# EAGLE board Main Board PCB v7 (EAGLE 9.7.0)
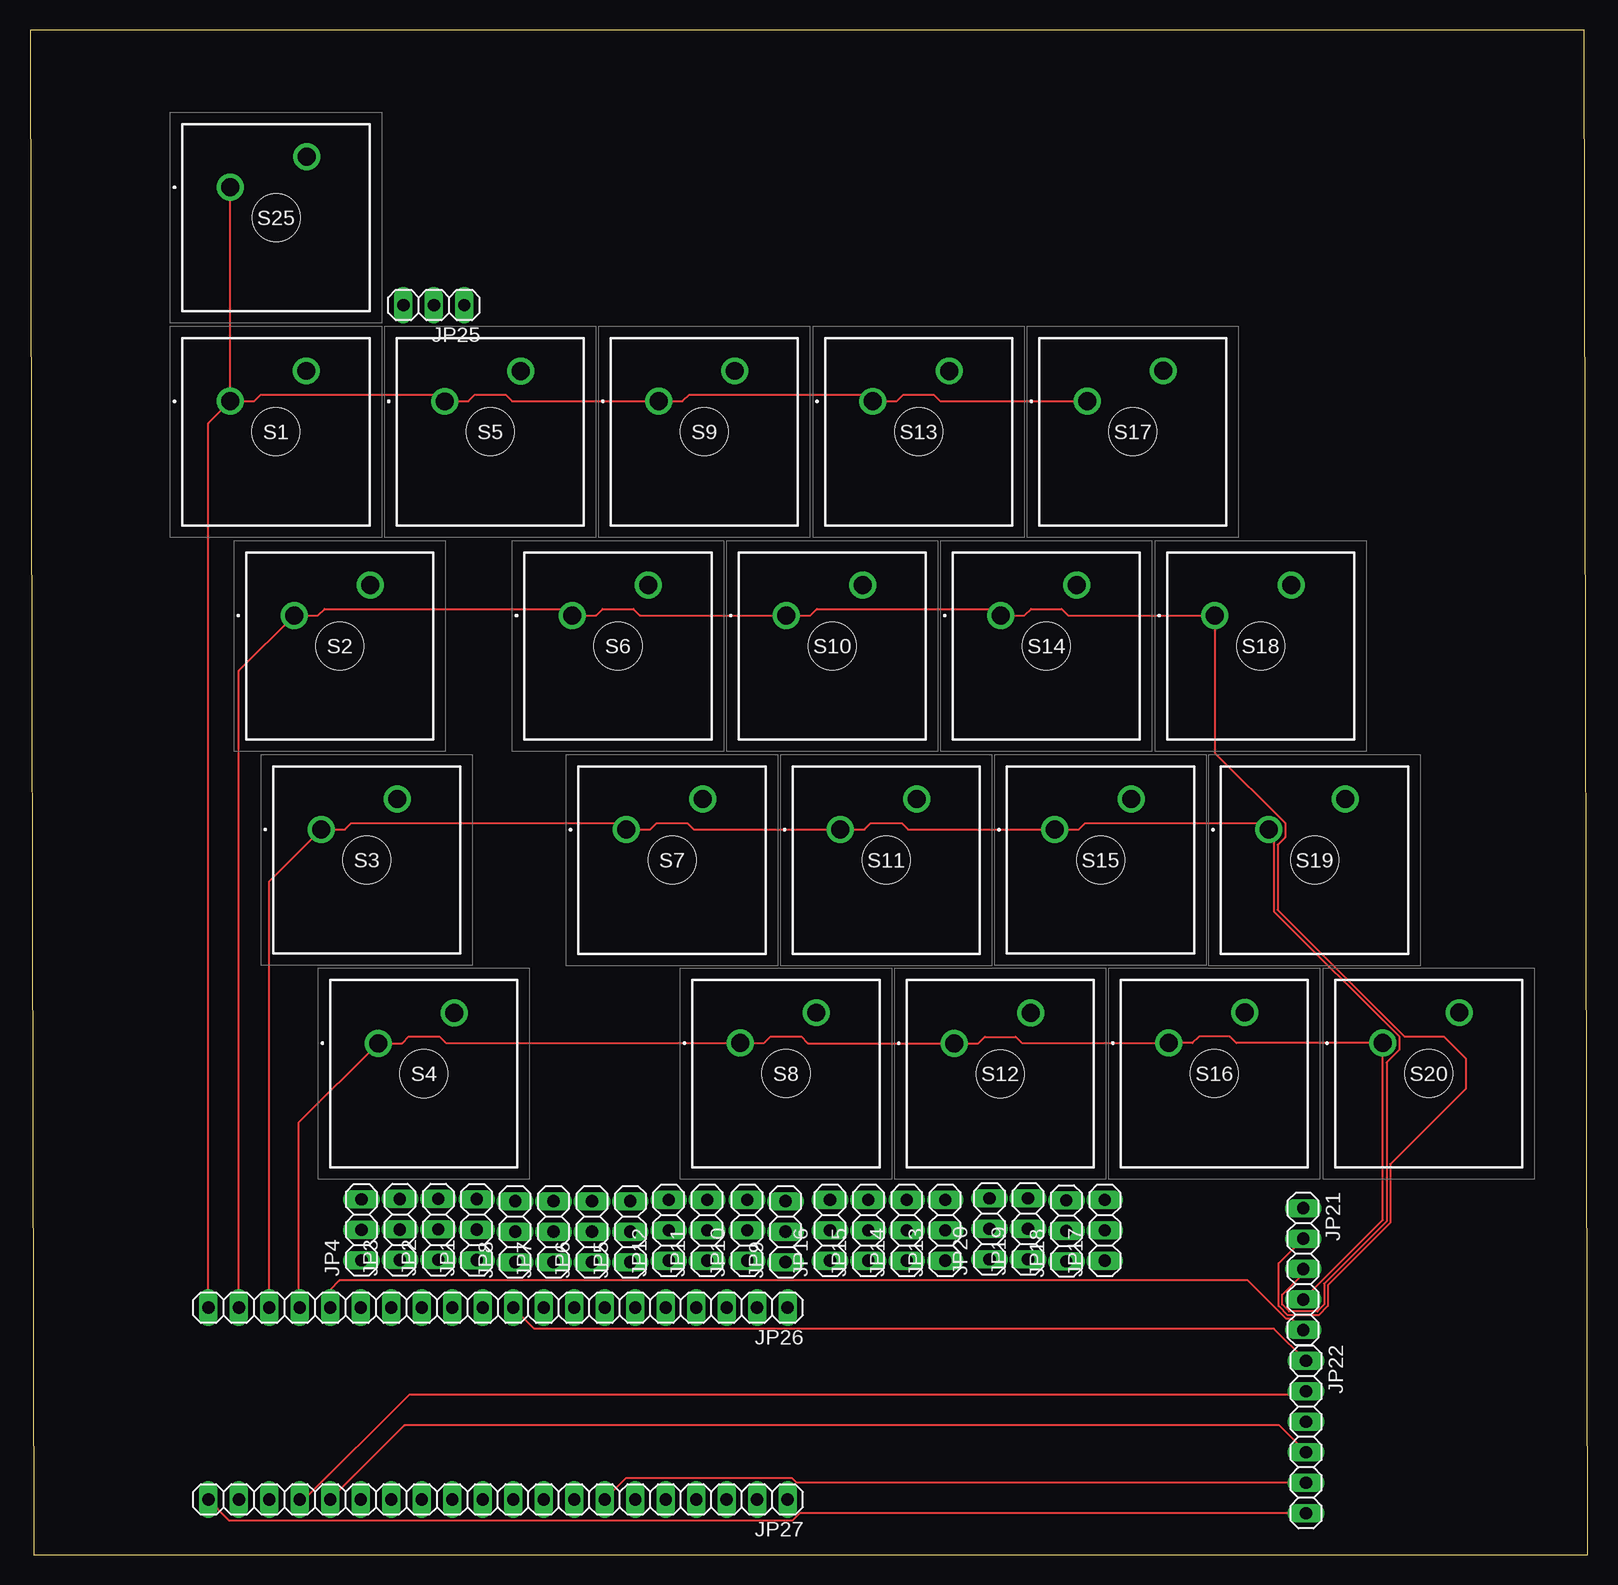
[diagram p0: board, top side]
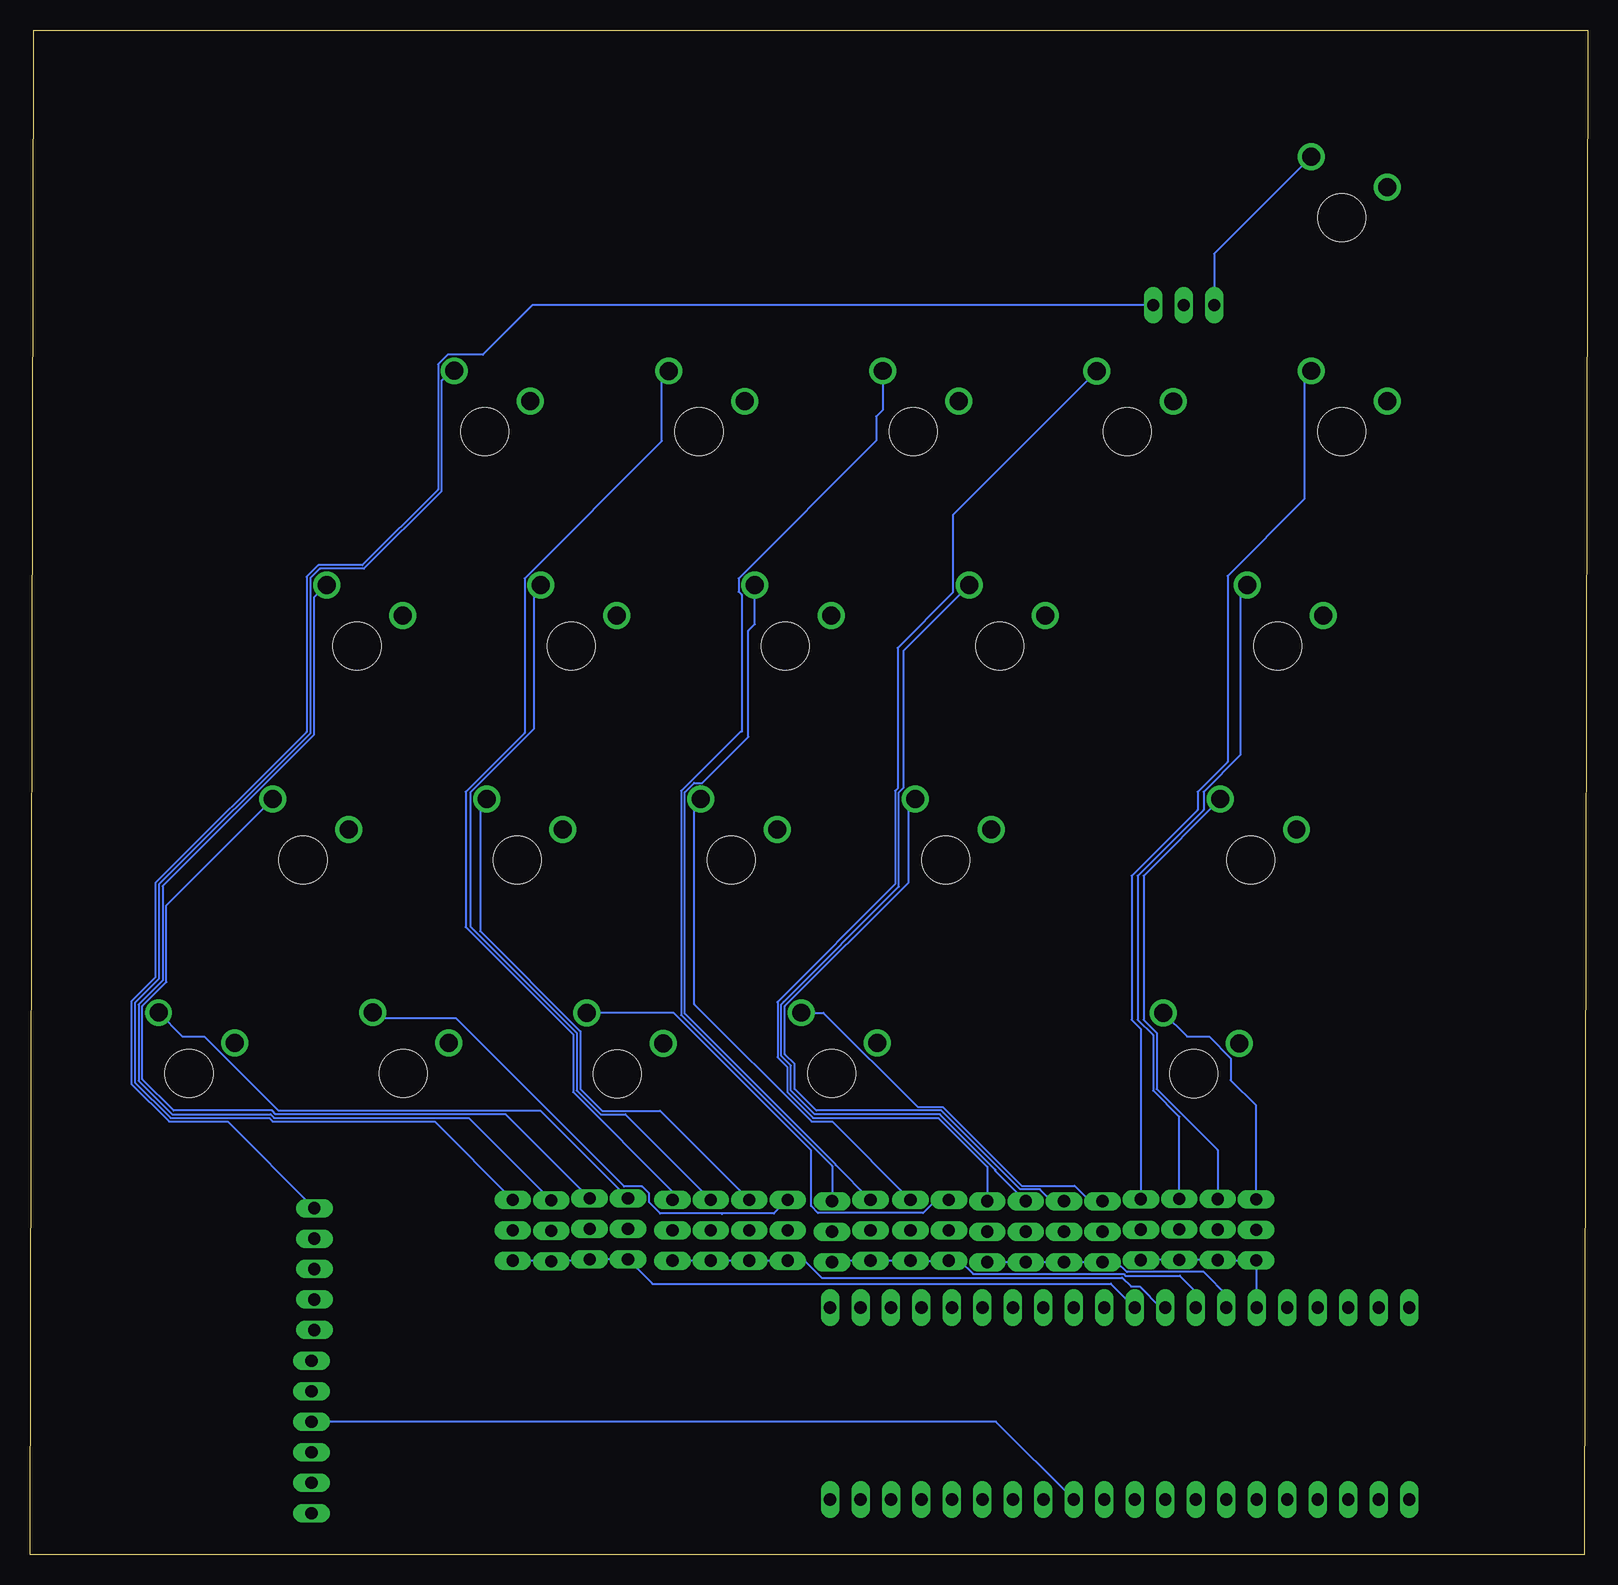
[diagram p1: board, bottom side, seen from below]

Size 129.8 x 127.1 mm. Coordinates in mm from the lower left corner, seen from the top.
Outline: 0.3,0 129.8,0 129.5,127.1 0,127.1 0.3,0
Copper layers (1*16): Top / Bottom
Stack-up Default Layer Stack: Top User Defined 0.035mm / Dielectric-1 User Defined 1.5mm / Bottom User Defined 0.035mm
Design rules "default": minimum track width 6mil, minimum drill 0.35mm, track to track 6mil, track to pad 6mil, pad to pad 6mil, via to via 6mil, smd to smd 6mil, copper to edge 40mil, drill to drill 6mil, minimum pad ring 10mil, minimum via ring 8mil, stop-mask expansion 4mil, vias tented up to drill 0mil, thermal gap 10mil

## Footprints (pad centres in the part's own frame; a part is rotated, then mirrored left to right if it is on the bottom)
1X03 = drill 1.016 long: 1 -2.54,0; 2 0,0; 3 2.54,0
1X05 = drill 1.016 long: 1 -5.08,0; 2 -2.54,0; 3 0,0; 4 2.54,0; 5 5.08,0
1X06 = drill 1.016 long: 1 -6.35,0; 2 -3.81,0; 3 -1.27,0; 4 1.27,0; 5 3.81,0; 6 6.35,0
1X20 = drill 1.016 long: 1 -24.13,0; 2 -21.59,0; 3 -19.05,0; 4 -16.51,0; 5 -13.97,0; 6 -11.43,0; 7 -8.89,0; 8 -6.35,0; 9 -3.81,0; 10 -1.27,0; 11 1.27,0; 12 3.81,0; 13 6.35,0; 14 8.89,0; 15 11.43,0; 16 13.97,0; 17 16.51,0; 18 19.05,0; 19 21.59,0; 20 24.13,0
MX1AE1NW = drill 1.499 pad 2.248: 1 0,0; 2 6.35,2.54 | hole 3.988: 3.81,-2.54

## Placement (x,y rotation side)
JP1  PINHD-1X3  [1X03]  37.23,27.09 90 top
JP2  PINHD-1X3  [1X03]  34.02,27.12 90 top
JP3  PINHD-1X3  [1X03]  30.82,27.11 90 top
JP4  PINHD-1X3  [1X03]  27.62,27.09 90 top
JP5  PINHD-1X3  [1X03]  50.03,26.93 90 top
JP6  PINHD-1X3  [1X03]  46.83,26.93 90 top
JP7  PINHD-1X3  [1X03]  43.63,26.93 90 top
JP8  PINHD-1X3  [1X03]  40.43,26.93 90 top
JP9  PINHD-1X3  [1X03]  62.96,26.93 90 top
JP10  PINHD-1X3  [1X03]  59.76,27.05 90 top
JP11  PINHD-1X3  [1X03]  56.43,27.05 90 top
JP12  PINHD-1X3  [1X03]  53.23,27.05 90 top
JP13  PINHD-1X3  [1X03]  76.26,27.05 90 top
JP14  PINHD-1X3  [1X03]  73.06,27.05 90 top
JP15  PINHD-1X3  [1X03]  69.86,27.05 90 top
JP16  PINHD-1X3  [1X03]  66.66,27.05 90 top
JP17  PINHD-1X3  [1X03]  89.56,27.05 90 top
JP18  PINHD-1X3  [1X03]  86.36,27 90 top
JP19  PINHD-1X3  [1X03]  83.16,27.17 90 top
JP20  PINHD-1X3  [1X03]  79.96,27.17 90 top
JP21  PINHD-1X5  [1X05]  106.1,23.81 270 top
JP22  PINHD-1X6  [1X06]  106.34,9.81 270 top
JP25  PINHD-1X3  [1X03]  33.66,104.17 180 top
JP26  PINHD-1X20  [1X20]  39,20.6 180 top
JP27  PINHD-1X20  [1X20]  39,4.6 180 top
S1  MX1A-E1NW  [MX1AE1NW]  16.69,96.14 0 top
S2  MX1A-E1NW  [MX1AE1NW]  22.01,78.29 0 top
S3  MX1A-E1NW  [MX1AE1NW]  24.26,60.45 0 top
S4  MX1A-E1NW  [MX1AE1NW]  29.01,42.64 0 top
S5  MX1A-E1NW  [MX1AE1NW]  34.54,96.14 0 top
S6  MX1A-E1NW  [MX1AE1NW]  45.19,78.29 0 top
S7  MX1A-E1NW  [MX1AE1NW]  49.7,60.44 0 top
S8  MX1A-E1NW  [MX1AE1NW]  59.19,42.64 0 top
S9  MX1A-E1NW  [MX1AE1NW]  52.39,96.14 0 top
S10  MX1A-E1NW  [MX1AE1NW]  63.04,78.29 0 top
S11  MX1A-E1NW  [MX1AE1NW]  67.54,60.44 0 top
S12  MX1A-E1NW  [MX1AE1NW]  77.04,42.64 0 top
S13  MX1A-E1NW  [MX1AE1NW]  70.24,96.14 0 top
S14  MX1A-E1NW  [MX1AE1NW]  80.89,78.29 0 top
S15  MX1A-E1NW  [MX1AE1NW]  85.4,60.44 0 top
S16  MX1A-E1NW  [MX1AE1NW]  94.89,42.65 0 top
S17  MX1A-E1NW  [MX1AE1NW]  88.09,96.14 0 top
S18  MX1A-E1NW  [MX1AE1NW]  98.74,78.29 0 top
S19  MX1A-E1NW  [MX1AE1NW]  103.24,60.44 0 top
S20  MX1A-E1NW  [MX1AE1NW]  112.74,42.64 0 top
S25  MX1A-E1NW  [MX1AE1NW]  16.69,113.99 0 top

## Library data of the parts
JP1-JP22 JP25-JP27 = Connector; CATEGORY: CONNECTOR; SUB-CATEGORY: PIN-HEADER
S1-S20 S25 = SamacSys_Parts; DESCRIPTION: Pushbutton Switches Full Travel, Mech. Keyswitch, Click Tactile Feel (Blue stem), 60cN, No LED, No Diode, Fixation Pins for PCB Mounting; HEIGHT: 15.2mm; MANUFACTURER_NAME: Cherry; MANUFACTURER_PART_NUMBER: MX1A-E1NW; MOUSER_PART_NUMBER: 540-MX1A-E1NW; MOUSER_PRICE-STOCK: https://www.mouser.co.uk/ProductDetail/CHERRY/MX1A-E1NW/?qs=Z7NFYKyvgJd45Wm4xzFv7w%3D%3D

## Nets
N$1: JP1.3 S1.2
N$2: JP2.3 S2.2
N$3: JP3.3 S3.2
N$4: JP4.3 S4.2
N$5: JP5.3 S5.2
N$6: JP6.3 S6.2
N$7: JP7.3 S7.2
N$8: JP8.3 S8.2
N$9: JP9.3 S9.2
N$10: JP10.3 S10.2
N$11: JP11.3 S11.2
N$12: JP12.3 S12.2
N$13: JP13.3 S13.2
N$14: JP14.3 S14.2
N$15: JP15.3 S15.2
N$16: JP16.3 S16.2
N$17: JP17.3 S17.2
N$18: JP18.3 S18.2
N$19: JP19.3 S19.2
N$20: JP20.3 S20.2
N$21: JP21.1 JP25.1
N$22: JP21.5 JP26.16
N$23: JP22.1 JP26.10
N$24: JP22.6 JP27.20
N$25: JP25.3 S25.2
N$26: JP1.1 JP2.1 JP3.1 JP4.1 JP26.15
N$27: JP5.1 JP6.1 JP7.1 JP8.1 JP26.14
N$28: JP9.1 JP10.1 JP11.1 JP12.1 JP26.13
N$29: JP13.1 JP14.1 JP15.1 JP16.1 JP26.12
N$30: JP17.1 JP18.1 JP19.1 JP20.1 JP26.11
N$31: JP22.2 JP27.17
N$32: JP21.4 JP26.17 S4.1 S8.1 S12.1 S16.1 S20.1
N$33: JP21.3 JP26.18 S3.1 S7.1 S11.1 S15.1 S19.1
N$34: JP21.2 JP26.19 S2.1 S6.1 S10.1 S14.1 S18.1
N$35: JP26.20 S1.1 S5.1 S9.1 S13.1 S17.1 S25.1
N$36: JP22.4 JP27.16
N$37: JP22.3 JP27.9
N$38: JP22.5 JP27.7

## Tracks (layer width: path | path; a pad name or v marks a point on that pad's centre or on a via)
N$1
  Bottom 0.152: S1.2 23.28,98.68 23.58,98.38 23.58,88.02 30,81.6 30,66.1 32.5,63.6 32.5,62.1 38,56.6 38,44.6 37.23,43.83 JP1.3
N$2
  Bottom 0.152: JP2.3 34.02,36.5 36.22,38.7 36.22,43.32 37.5,44.6 37.5,56.6 32,62.1 32,63.6 28.91,66.69 28.91,80.53 28.6,80.83 S2.2
N$3
  Bottom 0.152: S3.2 37,56.59 37,44.6 35.91,43.51 35.91,38.82 30.82,33.73 JP3.3
N$4
  Bottom 0.152: JP4.3 27.62,37.44 29.74,39.55 29.74,41.38 31.55,43.19 33.37,43.19 S4.2
N$5
  Bottom 0.152: S5.2 52.89,86.68 52.89,80.21 57.5,75.6 57.5,63.87 57.7,63.67 57.7,55.9 67.5,46.1 67.5,46 67.5,41.46 66.7,40.66 66.7,38.57 64.53,36.41 54.1,36.41 50.03,32.34 JP5.3
N$6
  Bottom 0.152: S6.2 57,75.37 57,63.94 57.4,63.54 57.4,55.7 67,46.1 67,46.07 67.2,45.87 67.2,41.59 66.39,40.78 66.39,38.7 64.4,36.71 53.97,36.71 49.35,32.1 49.35,32 JP6.3
N$7
  Bottom 0.152: S7.2 56.29,62.98 56.59,62.68 56.59,56.04 66.89,45.74 66.89,41.72 66.09,40.91 66.09,38.83 64.28,37.02 53.84,37.02 47.29,30.46 45.65,30.46 44.66,29.47 JP7.3
N$8
  Bottom 0.152: JP8.3 41.46,29.47 42.76,30.77 47.16,30.77 53.72,37.32 55.82,37.32 63.68,45.18 S8.2
N$9
  Bottom 0.152: S9.2 58.73,95.43 59.28,94.88 59.28,92.85 70.74,81.39 70.74,80.27 70.5,80.03 70.5,68.6 70.61,68.6 75.55,63.67 75.55,44.98 62.96,32.4 JP9.3
N$10
  Bottom 0.152: S10.2 69.39,77.57 69.94,77.03 69.94,68.16 73.77,64.33 74.45,64.33 75.24,63.54 75.24,45.11 62.66,32.53 62.66,32.49 JP10.3
N$11
  Bottom 0.152: S11.2 74.13,62.98 74.44,62.68 74.44,45.88 64.66,36.1 62.94,36.1 JP11.3
N$12
  Bottom 0.152: JP12.3 54.26,29.59 55.38,28.48 64.13,28.48 64.71,29.06 64.71,33.72 76.17,45.18 S12.2
N$13
  Bottom 0.152: JP13.3 76.26,30.28 84.55,38.57 84.55,43.37 93.5,52.33 93.5,63.6 88.59,68.51 88.59,81.39 77.14,92.84 77.14,98.38 76.83,98.68 S13.2
N$14
  Bottom 0.152: S14.2 87.48,80.83 87.78,80.53 87.78,68.86 93.1,63.54 93.1,52.36 84.24,43.5 84.24,38.69 82.25,36.7 80.18,36.7 JP14.3
N$15
  Bottom 0.152: S15.2 92.3,62.43 92.3,51.99 83.94,43.63 83.94,38.82 82.13,37.01 77.28,37.01 JP15.3
N$16
  Bottom 0.152: 72.11,28.41 72.15,28.45 | JP16.3 67.8,28.45 72.15,28.45 | S16.2 100.74,44.69 94.28,44.69 80.29,30.7 78.79,30.7 78.21,30.12 78.21,29.38 77.28,28.45 72.15,28.45
N$17
  Bottom 0.152: JP17.3 96.08,36.11 109.57,36.11 109.88,36.41 118.08,36.41 121.05,39.38 121.05,46 119.05,48 119.05,55.86 106.44,68.47 106.44,81.39 105.65,82.19 101.98,82.19 95.49,88.68 95.49,97.88 94.69,98.68 S17.2
N$18
  Bottom 0.152: S18.2 106.14,79.79 106.14,68.34 118.75,55.73 118.75,47.87 120.75,45.87 120.75,39.51 117.95,36.71 109.75,36.71 109.45,36.41 93.24,36.41 JP18.3
N$19
  Bottom 0.152: JP19.3 90.17,36.71 109.32,36.71 109.62,37.02 117.83,37.02 120.44,39.63 120.44,45.75 118.44,47.75 118.44,54.12 S19.2
N$20
  Bottom 0.152: S20.2 117.1,43.19 115.27,43.19 109.1,37.02 87.27,37.02 JP20.3
N$21
  Bottom 0.152: JP25.1 87.93,104.17 92.06,100.04 95,100.04 95.8,99.24 95.8,88.8 102.11,82.49 105.78,82.49 106.75,81.52 106.75,68.59 119.36,55.98 119.36,48.12 121.36,46.12 121.36,39.25 118.21,36.1 113.31,36.1 JP21.1
N$22
  Top 0.152: JP26.16 25.03,22.1 25.78,22.85 101.49,22.85 104.67,19.67 105.16,19.67 JP21.5
N$23
  Top 0.152: JP22.1 103.65,18.85 42.02,18.85 JP26.10
N$24
  Top 0.152: JP22.6 64.15,3.46 63.54,2.85 16.62,2.85 JP27.20
N$25
  Bottom 0.152: S25.2 31.12,108.45 JP25.3
N$26
  Top 0.152: 30.31,24.55 30.32,24.57 JP3.1 | 34.02,24.57 JP2.1 | 36.7,24.58 36.73,24.55 JP1.1
  Bottom 0.152: JP26.15 27.57,24.5 JP4.1 30.31,24.55 30.32,24.57 JP3.1 34.02,24.57 JP2.1 36.7,24.58 36.73,24.55 JP1.1
N$27
  Bottom 0.152: JP26.14 29.93,20.78 29.93,21.5 31.99,23.56 38.4,23.56 39.22,24.39 JP8.1 JP7.1 JP6.1 JP5.1
N$28
  Bottom 0.152: JP26.13 32.56,20.69 32.56,21.84 33.98,23.26 38.52,23.26 38.66,23.4 51.2,23.4 52.31,24.51 JP12.1 JP11.1 JP10.1 62.34,24.51 62.46,24.39 JP9.1
N$29
  Bottom 0.152: JP15.1 JP16.1 65.25,24.51 63.83,23.09 38.79,23.09 38.05,22.35 37.32,22.35 35.57,20.6 JP26.12 | JP15.1 JP14.1 | JP15.1 JP13.1
N$30
  Bottom 0.152: JP17.1 89.52,24.56 86.47,24.56 | 86.47,24.56 83.24,24.56 JP19.1 JP20.1 77.96,22.63 77.96,22.59 39.73,22.59 JP26.11 | JP18.1 86.47,24.56
N$31
  Top 0.152: JP22.2 106.08,13.36 31.63,13.36 22.87,4.6 JP27.17
N$32
  Top 0.152: JP21.4 112.74,27.91 S20.1 100.52,42.64 99.97,43.19 97.42,43.19 96.87,42.65 S16.1 82.67,42.65 82.13,43.18 79.57,43.18 79.03,42.63 S12.1 64.83,42.63 64.28,43.19 61.72,43.19 61.17,42.64 S8.1 34.65,42.64 34.1,43.19 31.55,43.19 31,42.64 S4.1 22.37,36 22.37,20.72 JP26.17
N$33
  Top 0.152: JP26.18 19.95,56.14 S3.1 26.24,60.45 26.79,60.99 49.14,60.99 S7.1 51.68,60.44 52.23,60.99 54.78,60.99 55.33,60.44 S11.1 69.53,60.44 70.07,60.99 72.63,60.99 73.17,60.44 S15.1 87.39,60.44 87.93,60.99 102.69,60.99 S19.1 103.66,60.02 103.66,53.64 114.09,43.2 114.09,42.08 113.05,41.04 113.05,27.78 107.85,22.59 107.85,20.86 107.27,20.28 104.93,20.28 104.35,20.86 104.35,21.68 106.1,23.43 JP21.3
N$34
  Top 0.152: JP26.19 17.41,73.69 S2.1 24,78.29 24.54,78.84 44.64,78.84 S6.1 47.18,78.29 47.72,78.84 50.28,78.84 50.82,78.29 S10.1 65.03,78.29 65.57,78.84 80.34,78.84 S14.1 82.87,78.29 83.42,78.84 85.98,78.84 86.52,78.29 S18.1 98.74,66.85 104.59,61 104.59,59.8 103.96,59.18 103.96,53.77 114.54,43.19 117.83,43.19 119.64,41.38 119.64,38.83 113.35,32.54 113.35,27.66 108.16,22.46 108.16,20.73 107.4,19.98 104.8,19.98 104.04,20.73 104.04,24.29 JP21.2
N$35
  Top 0.152: JP26.20 14.87,94.33 S1.1 | S1.1 S25.1 | S1.1 18.67,96.14 19.22,96.69 34,96.69 S5.1 36.53,96.14 37.08,96.69 39.63,96.69 40.18,96.14 S9.1 54.37,96.14 54.92,96.69 69.69,96.69 S13.1 72.23,96.14 72.77,96.69 75.33,96.69 75.87,96.14 S17.1
N$36
  Top 0.152: JP22.4 104.11,10.77 31.2,10.77 JP27.16
N$37
  Bottom 0.152: JP27.9 49.31,11.1 106.32,11.1 JP22.3
N$38
  Top 0.152: JP22.5 63.89,6 63.54,6.35 49.64,6.35 JP27.7